# EAGLE board sdr_cutoff (EAGLE 9.6.2)
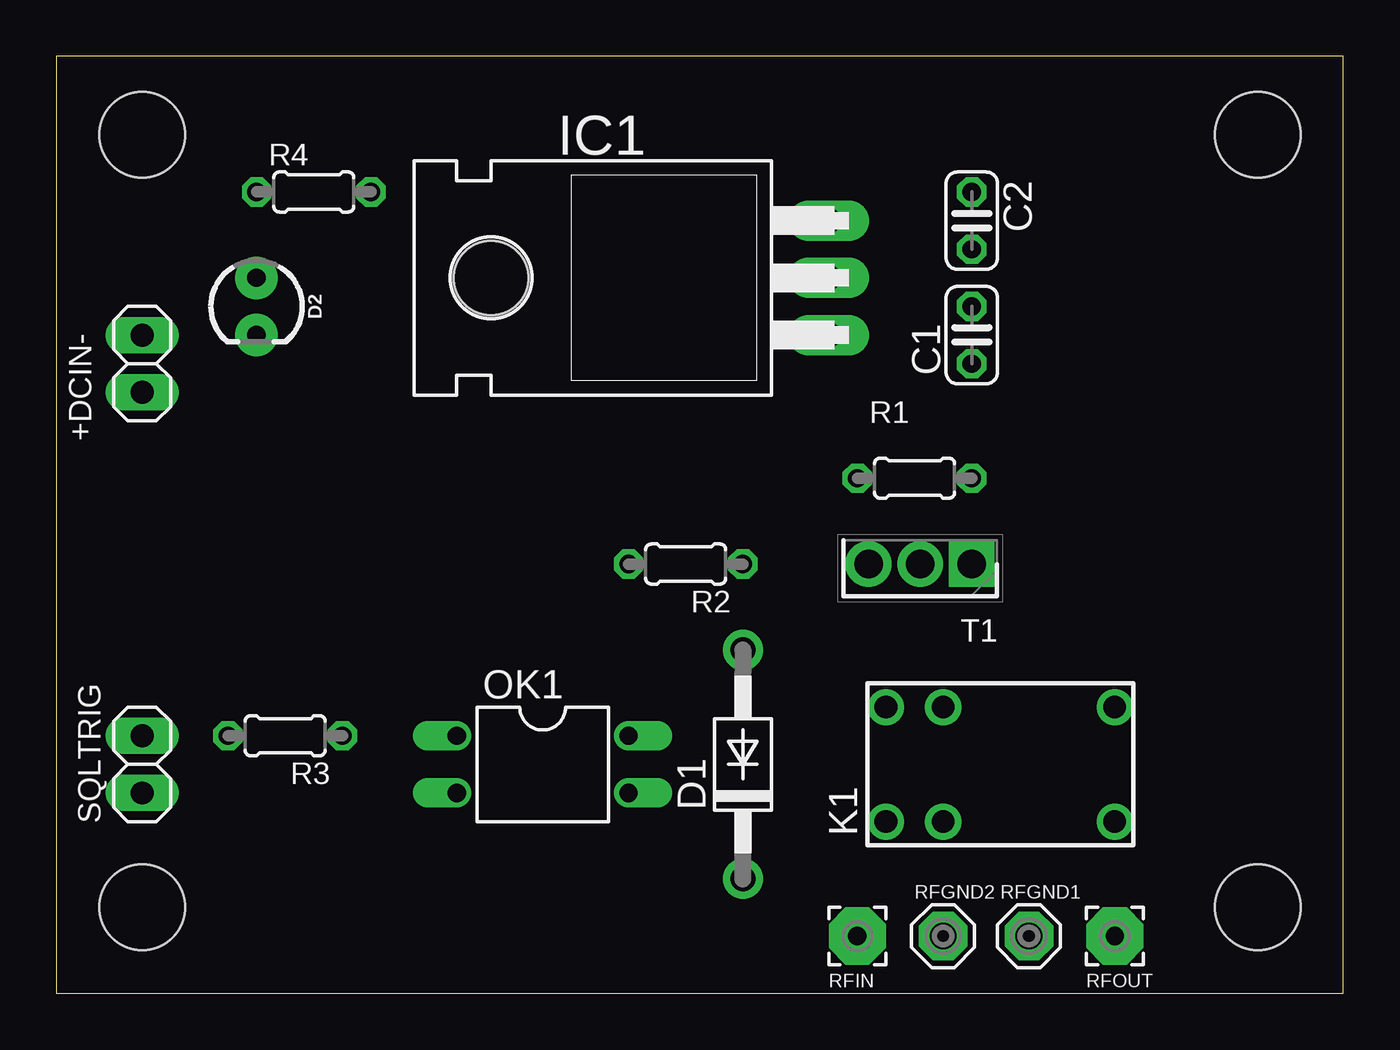
[diagram p0: board, top side]
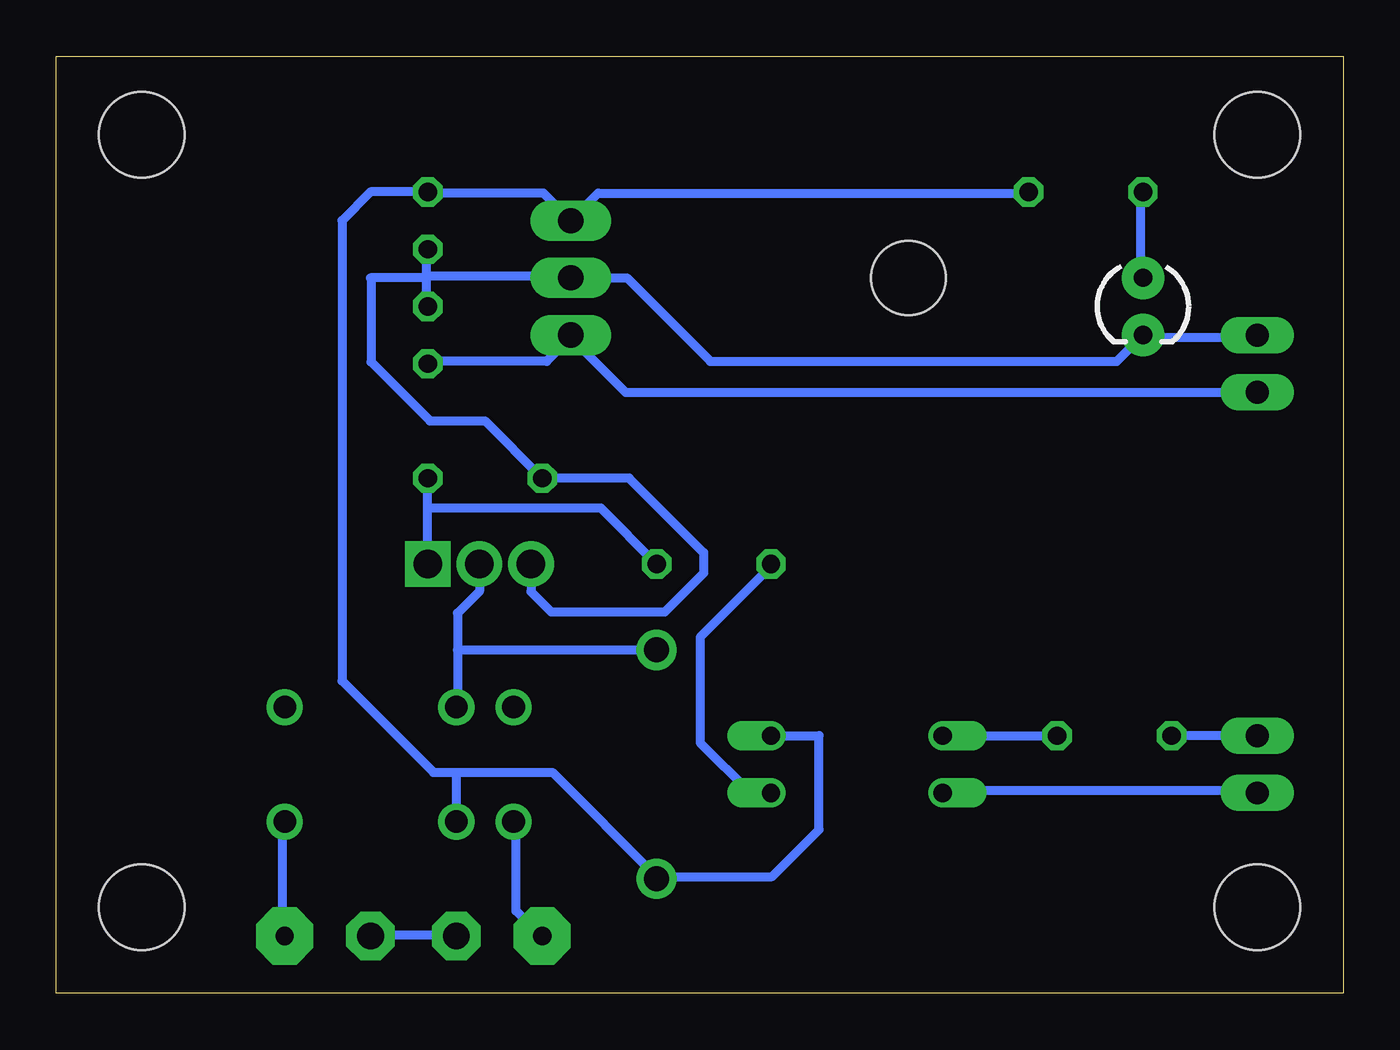
[diagram p1: board, bottom side, seen from below]

Size 57.13 x 41.58 mm. Coordinates in mm from the lower left corner, seen from the top.
Outline: 0,0 57.13,0 57.13,41.58 0,41.58 0,0
Copper layers (1*16): Top 0.035mm / dielectric 1.5mm / Bottom 0.035mm
Design rules "default *": minimum track width 18mil, minimum drill 0.35mm, track to track 6mil, track to pad 6mil, pad to pad 6mil, via to via 6mil, smd to smd 6mil, copper to edge 40mil, drill to drill 6mil, minimum pad ring 8mil, minimum via ring 8mil, stop-mask expansion 4mil, vias tented up to drill 0mil, thermal gap 10mil
Holes 3.81 mm at 3.81,3.81 53.34,38.1 53.34,3.81 3.81,38.1

## Footprints (pad centres in the part's own frame; a part is rotated, then mirrored left to right if it is on the bottom)
1X02 = drill 1.016 long: 1 -1.27,0; 2 1.27,0
C025-024X044 = drill 0.813 octagon: 1 -1.27,0; 2 1.27,0
DO41-10 = drill 1.118: A 5.08,0; C -5.08,0
LED_3MM = drill 0.813 pad 1.88: A -1.27,0; K 1.27,0
TO220H = drill 1.118 long: 1 -2.54,-10.16; 2 0,-10.16; 3 2.54,-10.16 | hole 3.302: 0,4.826
HY = drill 1: 1 -2.54,-2.54; 2 -2.54,2.54; C@1 5.08,2.54; C@2 5.08,-2.54; NC -5.08,-2.54; NO -5.08,2.54
DIL04 = drill 0.813 offset: 1 -1.27,-3.81; 2 1.27,-3.81; 3 1.27,3.81; 4 -1.27,3.81
0204/5 = drill 0.813 octagon: 1 -2.54,0; 2 2.54,0
MCS08 = drill 1.194 pad 2.159 octagon: MP 0,0
2,54/0,8 = drill 0.813 pad 2.54 octagon: 1 0,0
TO229P250X658X985-3P = drill 1.27 pad 1.905 square: 1 0,0 | drill 1.27 pad 1.905: 2 2.29,0; 3 4.58,0

## Placement (x,y rotation side)
+DCIN-  [1X02]  3.81,27.94 270 top
C1  0.22uF  [C025-024X044]  40.64,29.21 90 top
C2  0.10uF  [C025-024X044]  40.64,34.29 270 top
D1  1N4004  [DO41-10]  30.48,10.16 90 top
D2  [LED_3MM]  8.89,30.48 270 top
IC1  7805T  [TO220H]  24.13,31.75 90 top
K1  HY1Z-5V  [HY]  41.91,10.16 0 top
OK1  PC814  [DIL04]  21.59,10.16 270 top
R1  100K  [0204/5]  38.1,22.86 0 top
R2  1K  [0204/5]  27.94,19.05 180 top
R3  1K  [0204/5]  10.16,11.43 180 top
R4  1K  [0204/5]  11.43,35.56 0 top
RFGND1  MCS08  [MCS08]  43.18,2.54 0 top
RFGND2  MCS08  [MCS08]  39.37,2.54 0 top
RFIN  [2,54/0,8]  35.56,2.54 0 top
RFOUT  [2,54/0,8]  46.99,2.54 0 top
SQLTRIG  [1X02]  3.81,10.16 90 top
T1  RFD14N05L  [TO229P250X658X985-3P]  40.64,19.05 180 top

## Library data of the parts
+DCIN- SQLTRIG = pinhead
C1 C2 = rcl; SPICEPREFIX: C
D1 = diode
D2 = SparkFun-LED; PROD_ID: DIO-08794
IC1 = linear
K1 = relay; MF: AROMAT/ MATSUSHITA; MPN: HY1Z-5V; OC_FARNELL: unknown; OC_NEWARK: 52F9234
OK1 = optocoupler; OC_FARNELL: 9707662; OC_NEWARK: unknown
R1-R4 = rcl; SPICEPREFIX: R
RFGND1 RFGND2 = solpad
RFIN RFOUT = wirepad
T1 = RFD14N05L; DESCRIPTION: Transistor,MOSFET,N Channel,RFD14N05L; HEIGHT: 2.5mm; MANUFACTURER_NAME: ON Semiconductor; MANUFACTURER_PART_NUMBER: RFD14N05L

## Nets
GND: +DCIN-.1 C1.2 C2.2 D2.K IC1.2 R1.1 T1.3
N$1: D1.A K1.2 T1.2
N$2: OK1.3 R2.2
N$3: R1.2 R2.1 T1.1
N$4: OK1.1 R3.1
N$5: OK1.2 SQLTRIG.1
N$6: R3.2 SQLTRIG.2
N$7: RFGND1.MP RFGND2.MP
N$8: +DCIN-.2 C1.1 IC1.1
N$9: K1.NC RFIN.1
N$10: D2.A R4.1
N$11: K1.C@2 RFOUT.1
VCC: C2.1 D1.C IC1.3 K1.1 OK1.4 R4.2

## Tracks (layer width: path | path; a pad name or v marks a point on that pad's centre or on a via)
GND
  Bottom 0.152: 3.81,29.11 +DCIN-.1 | 43.18,31.75 43.16,31.73 | 40.69,31.75 40.69,31.85 | 40.69,32.92 C2.2 | 34.29,31.85 IC1.2 | 8.89,29.11 D2.K
  Bottom 0.406: 43.18,31.75 40.69,31.75 40.69,30.48 C1.2 | 43.16,31.73 43.16,28.02 40.54,25.4 38.1,25.4 R1.1 31.7,22.86 28.4,19.56 28.4,18.64 30.12,16.92 35.15,16.92 36.06,17.82 T1.3 | 40.69,32.92 40.69,31.85 34.29,31.85 | D2.K 10.06,28.04 28.09,28.04 31.8,31.75 IC1.2 | 8.89,29.11 3.81,29.11
N$1
  Bottom 0.406: 39.32,15.24 39.32,16.87 38.35,17.84 T1.2 | 39.32,15.24 39.32,12.8 K1.2 | 39.32,15.24 D1.A
N$2
  Bottom 0.406: OK1.3 26.31,8.89 28.55,11.12 28.55,15.8 25.4,18.95 R2.2
N$3
  Bottom 0.406: R2.1 32.97,21.54 40.59,21.54 40.64,21.49 T1.1 R1.2
N$4
  Bottom 0.406: OK1.1 R3.1
N$5
  Bottom 0.152: 17.68,8.99 OK1.2 | 3.81,8.99 SQLTRIG.1
  Bottom 0.406: 3.81,8.99 17.68,8.99
N$6
  Bottom 0.406: SQLTRIG.2 R3.2
N$7
  Bottom 0.152: 39.47,2.59 RFGND2.MP | 43.13,2.59 RFGND1.MP
  Bottom 0.406: 43.13,2.59 39.47,2.59
N$8
  Bottom 0.152: 40.54,28.04 C1.1 | 34.29,29.11 IC1.1
  Bottom 0.406: 40.54,28.04 35.36,28.04 34.29,29.11 31.85,26.67 +DCIN-.2
N$9
  Bottom 0.152: 36.73,7.62 K1.NC | 35.66,2.59 RFIN.1
  Bottom 0.406: 36.73,7.62 36.73,3.66 35.66,2.59
N$10
  Bottom 0.152: 8.99,35.51 R4.1
  Bottom 0.406: 8.99,35.51 8.99,31.85 D2.A
N$11
  Bottom 0.152: 47.09,7.62 K1.C@2 | 47.09,2.59 RFOUT.1
  Bottom 0.406: 47.09,2.59 47.09,7.62
VCC
  Bottom 0.152: 30.48,5.18 D1.C | 14.02,35.51 R4.2 | 40.54,35.51 C2.1
  Bottom 0.406: OK1.4 23.27,11.43 23.27,7.26 25.35,5.18 30.48,5.18 35.1,9.8 39.37,9.8 | 14.02,35.51 33.07,35.51 IC1.3 35.51,35.51 40.54,35.51 | C2.1 43.18,35.56 44.45,34.29 44.45,13.87 40.39,9.8 39.37,9.8 | K1.1 39.37,9.8